# Altium PCB testboard_chip1_package.PcbDoc
Units mm, origin at the board's own origin, x right, y up, seen from the top; angles counter-clockwise.
Board outline 55.4 x 45 mm, 2 copper layers (Top Layer, Bottom Layer); 34 components, 95 nets, 192 pads, 15 vias.
Unrouted connection lines stored in the file: 76.
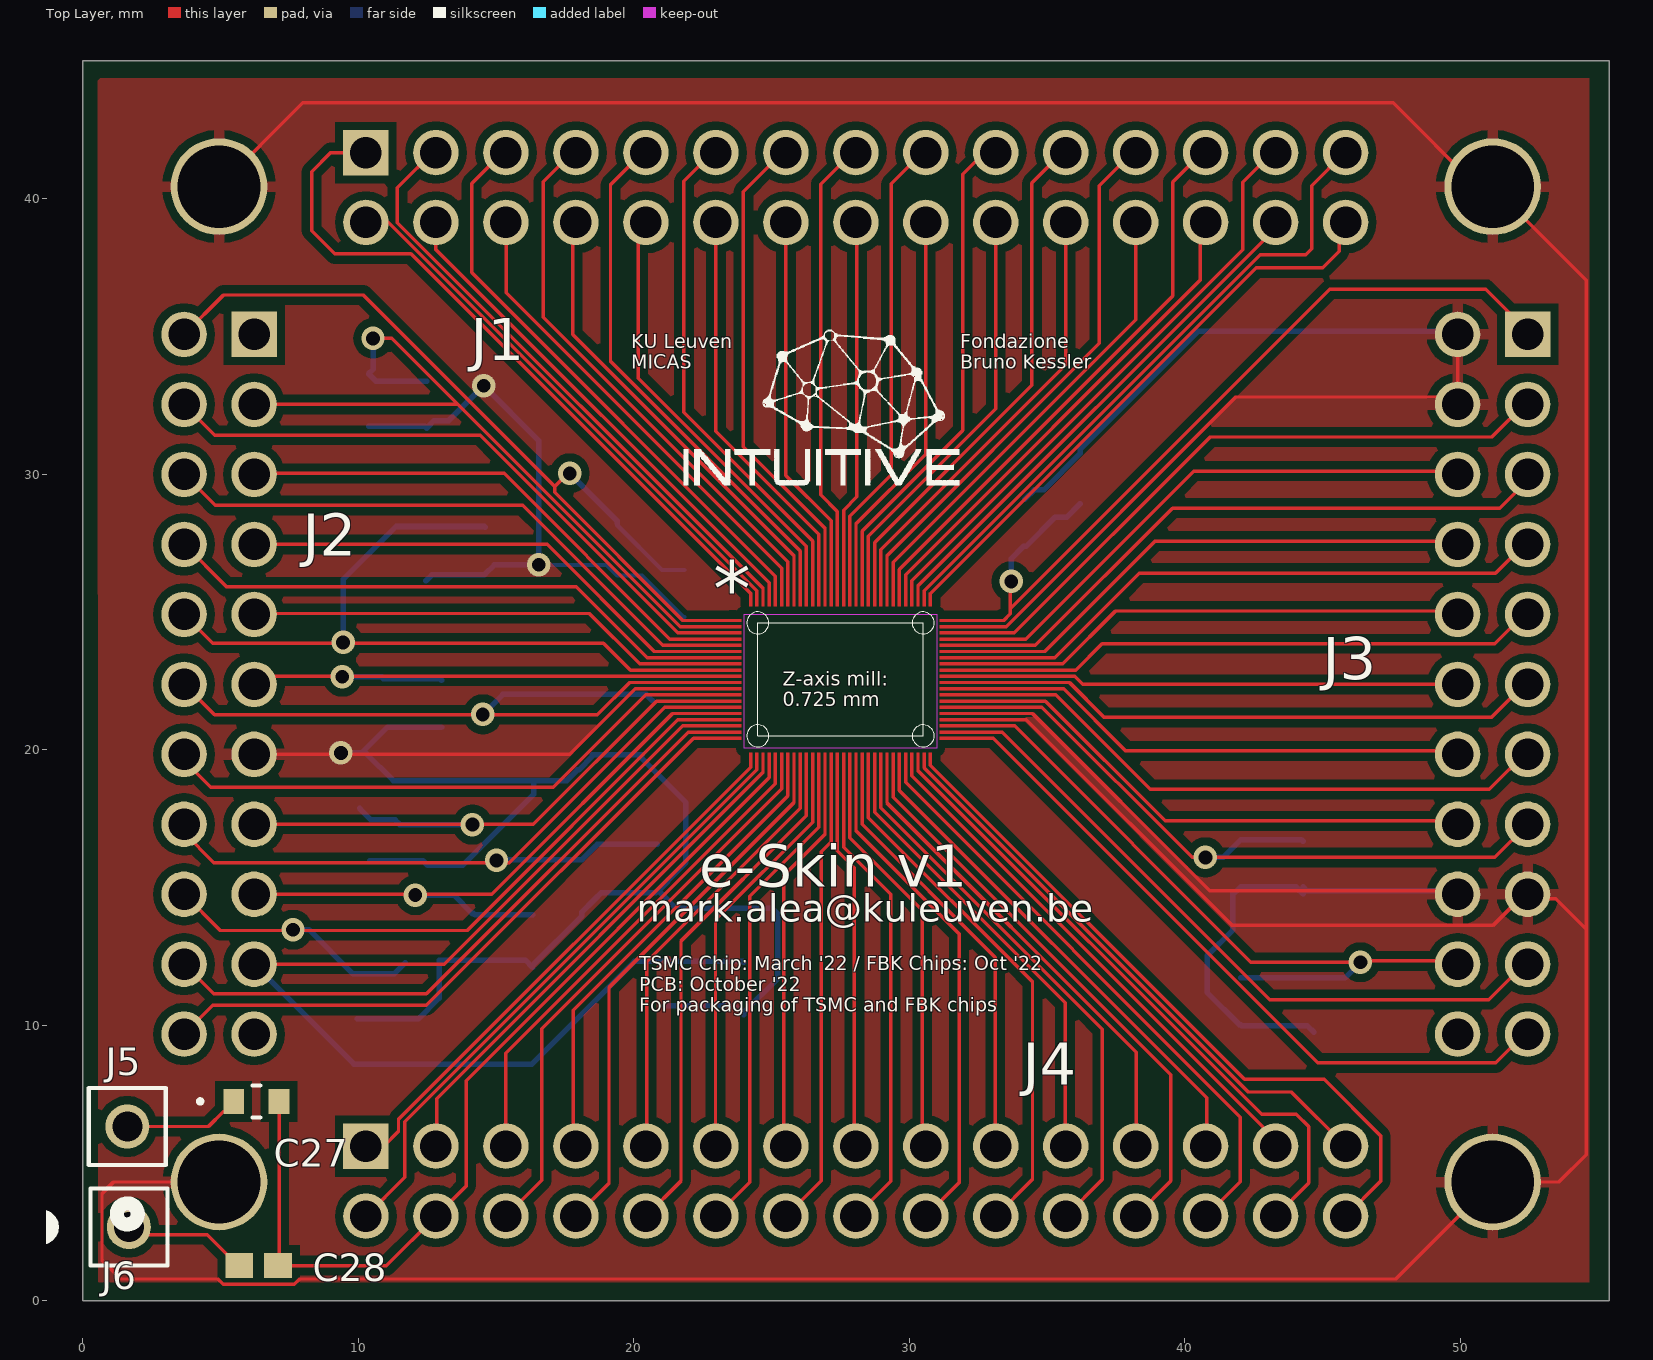
[diagram p0: Top Layer view]
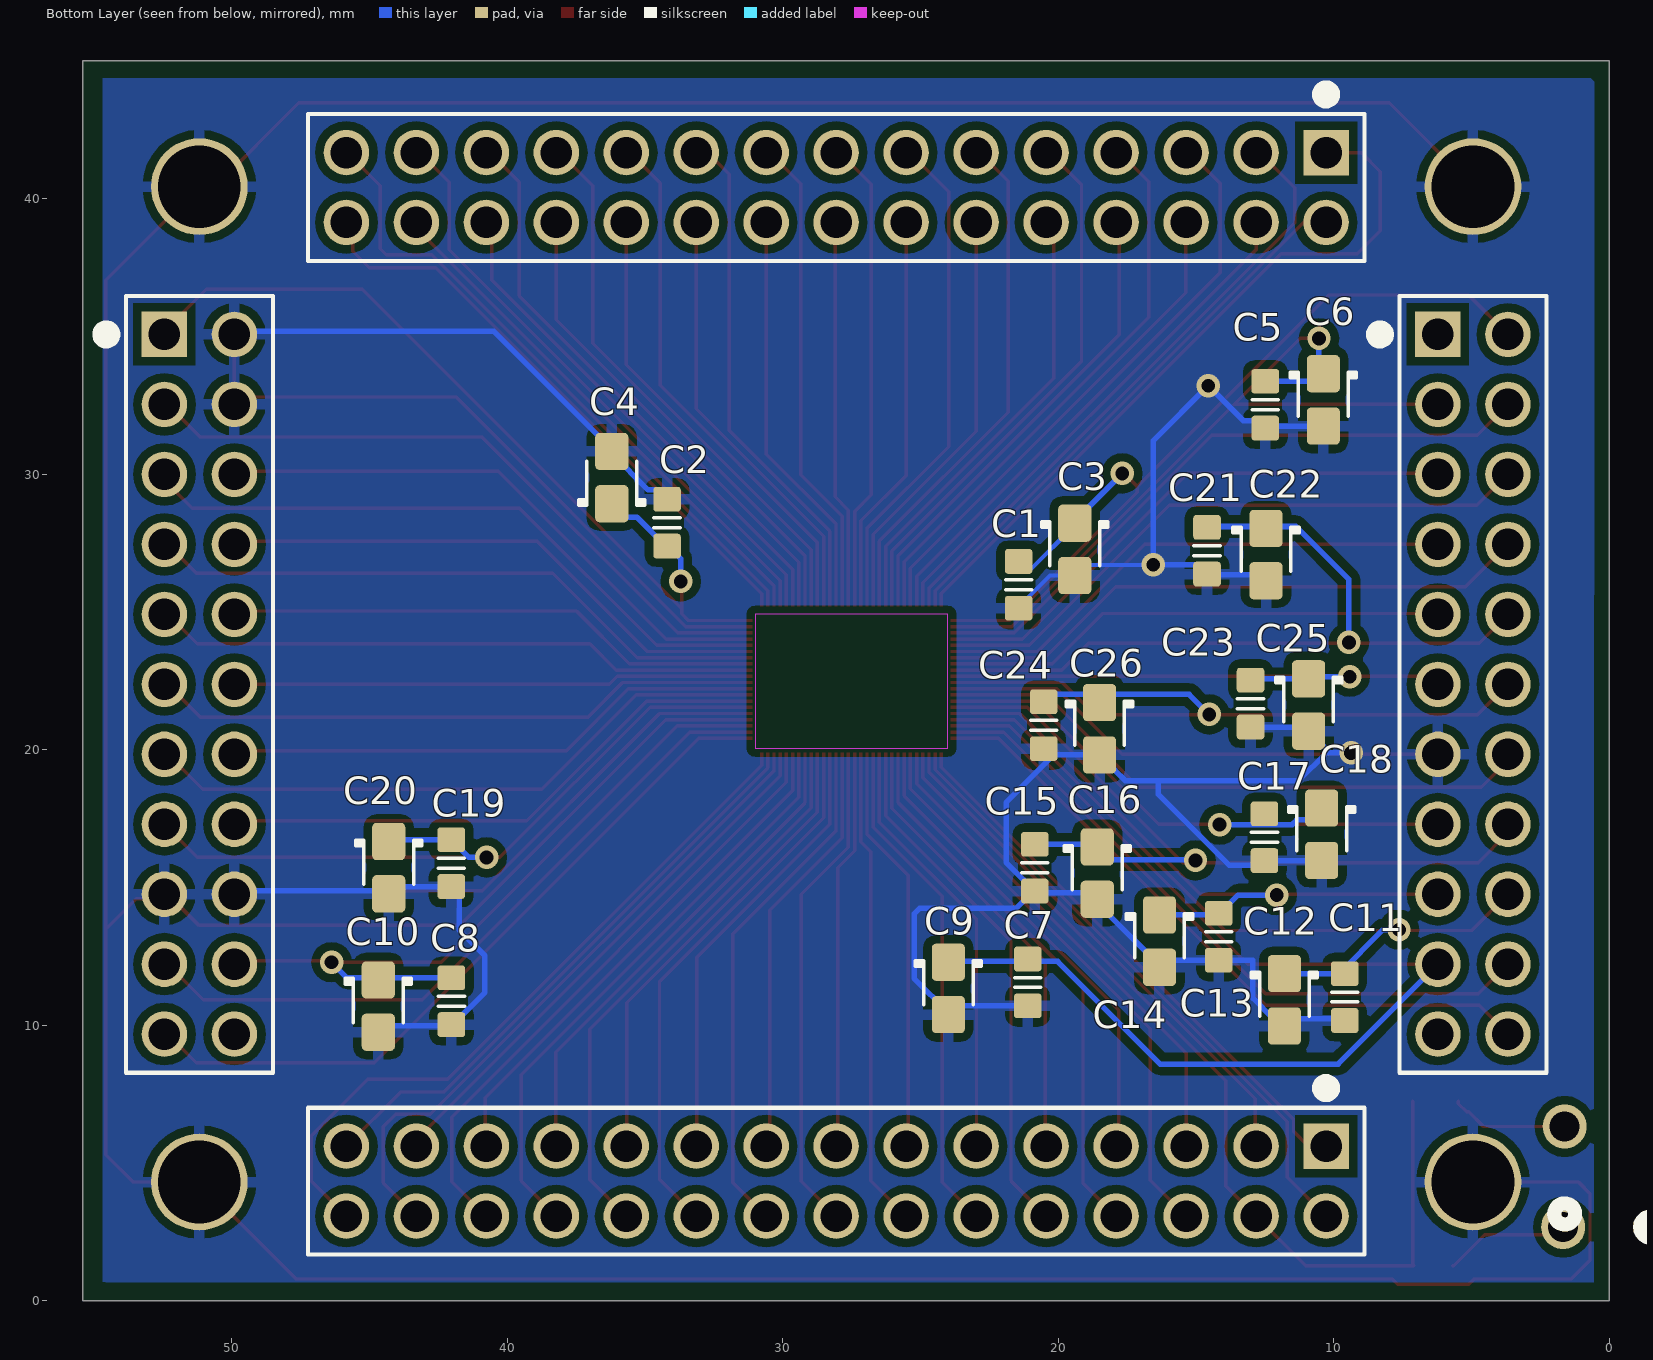
[diagram p1: Bottom Layer view, seen from below]

## Layer stack, top to bottom
Top Solder: solder mask 0.0102, Solder Resist, Dk 3.5
Top Layer: signal copper 0.0356
Dielectric 1: dielectric 0.32, FR-4, Dk 4.8
Bottom Layer: signal copper 0.0356
Bottom Solder: solder mask 0.0102, Solder Resist, Dk 3.5

## Board outline
0,0 55.4,0 55.4,45 0,45

## Design rules (kind name [scope] priority, off if disabled: settings)
BoardOutlineClearance [All] p1: gap=0.25 ignorepadtopadclearanceinfootprint=FALSE except(0: Arc-SplitContinuation Track-SplitContinuation SMDPad-SplitContinuation THPad-SplitContinuation Via-SplitContinuation Fill-SplitContinuation Poly-SplitContinuation Region-SplitContinuation Text-SplitContinuation)
Clearance Clearance-xPP-xTP-xTT [All] p1: gap=0.1 ignorepadtopadclearanceinfootprint=FALSE except(0: Arc-Hole Track-Hole SMDPad-Hole THPad-Hole Via-Hole Fill-Hole Poly-Hole Region-Hole Text-Hole; 0.15: Arc-Text Track-Text SMDPad-Text THPad-Text Via-Text Fill-Text Poly-Text Region-Text Text-Text; 0.2: Arc-Via Track-Via SMDPad-Via THPad-Via Via-Via)
ComponentClearance [All] p1: gap=0.25 collisioncheckmode=3 verticalgap=0.25 showdistances=FALSE
DiffPairsRouting [All] p1: maxlimit=0.25 minlimit=0.25 mostfreqgap=0.25 toplayer_minwidth=0.381 toplayer_maxwidth=0.381 toplayer_prefwidth=0.381 bottomlayer_minwidth=0.381 bottomlayer_maxwidth=0.381 bottomlayer_prefwidth=0.381 maxuncoupledlength=12.5
Height [All] p1: minheight=0 maxheight=25 prefheight=12.5
HoleSize HoleSize-PTH [All] p1: absolutevalues=TRUE maxlimit=2 minlimit=0.15 maxpercent=80.000 minpercent=20.000
HoleToHoleClearance [All] p1: gap=0.35 allowstackedmicrovias=TRUE
MinimumAnnularRing "Minimum IAR  <= 0.45mm" [((ObjectKind = 'Pad') OR (ObjectKind = 'Via')) And (Layer = 'MultiLayer') And (HoleDiameter <= AsMM(0.45))] p1: minimumring=0.125 // minimum inner annular ring for pads <= 0.45mm finished hole size
MinimumAnnularRing "Minimum IAR  > 0.45mm" [((ObjectKind = 'Pad') OR (ObjectKind = 'Via')) And (Layer = 'MultiLayer') And (HoleDiameter > AsMM(0.45))] p2: minimumring=0.125 // minimum inner annular ring for pads > 0.45mm finished hole size
MinimumAnnularRing Minimum-IAR [All] p3: minimumring=0.125
MinimumSolderMaskSliver [All] p1: minsoldermaskwidth=0.08
PlaneClearance PlaneClearance-IPI [All] p1: clearance=0.25
PlaneConnect [All] p1: planeconnectstyle=Relief reliefexpansion=0.15 reliefentries=4 reliefconductorwidth=0.2 reliefairgap=0.2
PolygonConnect PolygonConnect-xTW [All] p1: connectstyle=Relief reliefconductorwidth=0.2 reliefentries=4 polygonreliefangle="90 Angle" airgapwidth=0.2
RoutingCorners [All] p1: cornerstyle=45-Degree minsetback=2.5 maxsetback=2.5
RoutingVias "RoutingVias <= 0.45mm" [(ObjectKind = 'Via') And (HoleDiameter <= AsMM(0.45))] p1: holewidth=0.2 width=0.55 viastyle="Through Hole" minholewidth=0.15 minwidth=0.5 maxholewidth=0.45 maxwidth=0.8
RoutingVias "RoutingVias > 0.45mm" [(ObjectKind = 'Via') And (HoleDiameter > AsMM(0.45))] p2: holewidth=0.5 width=0.85 viastyle="Through Hole" minholewidth=0.5 minwidth=0.85 maxholewidth=0.9 maxwidth=1.25
SilkToSilkClearance [All] p1: silktosilkclearance=0.2
SilkToSolderMaskClearance SilkscreenOverComponentPads [IsPad] p1: minsilkscreentomaskgap=0.2 clearancetoexposedcopper=TRUE
SolderMaskExpansion [All] p1: expansion=0
UnRoutedNet [All] p1: checkbadconnections=TRUE
Width Width-xTW [All] p1: maxlimit=1.5 minlimit=0.1 preferedwidth=0.2
18 further rules are at their usual default settings.

## Classes and differential pairs
component class testboard_chip1_package: C3 C4 C5 C6 C7 C8 C9 C10 C11 C12 C13 C14 C15 C16 C17 C18 C19 C20 C21 C22 C23 C24 C25 C26 C27 C28 J1 J2 J3 J4 J5 J6

## Components (designator, comment, footprint, x,y, rotation, side; value= is the part's Value field where it differs from the comment)
C1 "approved sub OK" CAPC1608N 21.434,25.982 r270 bottom value=100n
C2 "approved sub OK" CAPC1608N 34.196,28.239 r90 bottom value=100n
C3 "10µ" CAPMP2012X150USR 19.396,27.27 r270 bottom
C4 "10µ" CAPMP2012X150USR 36.202,29.874 r90 bottom
C5 "approved sub OK" CAPC1608N 12.481,32.521 r270 bottom value=100n
C6 "10µ" CAPMP2012X150USR 10.375,32.693 r270 bottom
C7 "approved sub OK" CAPC1608N 21.104,11.55 r270 bottom value=100n
C8 "approved sub OK" CAPC1608N 42.024,10.868 r270 bottom value=100n
C9 "10µ" CAPMP2012X150USR 23.986,11.332 r270 bottom
C10 "10µ" CAPMP2012X150USR 44.678,10.692 r270 bottom
C11 "approved sub OK" CAPC1608N 9.595,11.017 r270 bottom value=100n
C12 "10µ" CAPMP2012X150USR 11.786,10.918 r270 bottom
C13 "approved sub OK" CAPC1608N 14.173,13.208 r270 bottom value=100n
C14 "10µ" CAPMP2012X150USR 16.321,13.048 r270 bottom
C15 "approved sub OK" CAPC1608N 20.846,15.714 r270 bottom value=100n
C16 "10µ" CAPMP2012X150USR 18.58,15.519 r270 bottom
C17 "approved sub OK" CAPC1608N 12.51,16.821 r270 bottom value=100n
C18 "10µ" CAPMP2012X150USR 10.432,16.929 r270 bottom
C19 "approved sub OK" CAPC1608N 42.03,15.88 r270 bottom value=100n
C20 "10µ" CAPMP2012X150USR 44.298,15.716 r270 bottom
C21 "approved sub OK" CAPC1608N 14.596,27.221 r270 bottom value=100n
C22 "10µ" CAPMP2012X150USR 12.454,27.08 r270 bottom
C23 "approved sub OK" CAPC1608N 13.017,21.67 r270 bottom value=100n
C24 "approved sub OK" CAPC1608N 20.526,20.884 r270 bottom value=100n
C25 "10µ" CAPMP2012X150USR 10.908,21.62 r270 bottom
C26 "10µ" CAPMP2012X150USR 18.497,20.758 r270 bottom
C27 "0.3pF Cpoly" CAP_0603_AVX 6.295,7.23 r0 top
C28 "2.5pF Cpoly" CAPC17090_87N_KEM 6.382,1.269 r0 top
J1 "TSW-115-07-F-D" TSW-115-07-G-D_SAI 45.836,41.674 r180 top locked
J2 "TSW-111-07-G-D" TSW-111-07-G-D_SAI 6.212,9.67 r90 top locked
J3 "TSW-111-07-G-D" TSW-111-07-G-D_SAI 52.44,9.67 r90 top
J4 "TSW-115-07-F-D" TSW-115-07-G-D_SAI 45.836,5.606 r180 top locked
J5 "901200761" CONN_90120-0761_MOL 1.613,6.32 r90 top
J6 "901200761" CONN_90120-0761_MOL 1.669,2.667 r0 top

## Footprints (in the part's own frame and the unit in brackets; to place one, negate y for a bottom-side part, rotate by r counter-clockwise, add the part's x,y. Pads: shape width x height; smd on the part's side, far side on the other; paste and mask are expansions set on the pad)
CAP_0603_AVX [mm]
  rect 0.75x0.91 smd paste+0 mask+0: 1(-0.825,0) 2(0.825,0)
  silkscreen extent -2.11,-0.58 0.14,0.58, body extent -0.85,-0.46 0.85,0.46, height 0.73
CAPC1608N [mm]
  round 0.254 on Mech14: 0(0,0)
  rrect25% 0.9x1 smd: 1(-0.85,0) 2(0.85,0)
  Top Layer pour cut-out: -0.4,0.6 0.4,0.6 0.4,-0.6 -0.4,-0.6
  silkscreen extent -0.18,-0.48 0.18,0.48, body extent -0.85,-0.45 0.85,0.45, height 0.89
CAPC17090_87N_KEM [mm]
  rect 1x0.9 smd paste+0 mask+0: 1(-0.7,0) 2(0.7,0)
  body extent -0.85,-0.45 0.85,0.45, height 0.87
CAPMP2012X150USR [mm]
  round 0.254 on Mech14: 0(0,0)
  rrect25% 1.35x1.2 smd: 1(-0.95,0) 2(0.95,0)
  Top Layer pour cut-out: -0.4,0.8 0.4,0.8 0.4,-0.8 -0.4,-0.8
  silkscreen extent -1,-1.2 0.6,1.2, body extent -1.02,-0.67 1.03,0.68, height 1.5
CONN_90120-0761_MOL [mil]
  round 63 hole 43 mask+0: 1(0,0)
  silkscreen extent -140,-55 55,55, body extent 0,0 10,10, height 10
TSW-111-07-G-D_SAI [mil]
  rect 65x65 hole 45 mask+0: 1(1000,0)
  round 65 hole 45 mask+0: 2(1000,100) 3(900,0) 4(900,100) 5(800,0) 6(800,100) 7(700,0) 8(700,100) 9(600,0) 10(600,100) 11(500,0) 12(500,100) 13(400,0) 14(400,100) 15(300,0) 16(300,100) 17(200,0) 18(200,100) 19(100,0) 20(100,100) 21(0,0) 22(0,100)
  body extent -55,-50 1045,150, height 330
TSW-115-07-G-D_SAI [mil]
  rect 65x65 hole 45 mask+0: 1(1400,0)
  round 65 hole 45 mask+0: 2(1400,100) 3(1300,0) 4(1300,100) 5(1200,0) 6(1200,100) 7(1100,0) 8(1100,100) 9(1000,0) 10(1000,100) 11(900,0) 12(900,100) 13(800,0) 14(800,100) 15(700,0) 16(700,100) 17(600,0) 18(600,100) 19(500,0) 20(500,100) 21(400,0) 22(400,100) 23(300,0) 24(300,100) 25(200,0) 26(200,100) 27(100,0) 28(100,100) 29(0,0) 30(0,100)
  body extent -40,-50 1460,150, height 330

## Part data
C1 C2 C5 C7 C8 C11 C13 C15 C17 C19 C21 C23 C24: library part CAPC_100n_0603, "Capacitor SMD Cer 100nF 10% 50V X7R 0603", Manufacturer 1="AVX Corporation", Manufacturer 2="TDK Corporation", Manufacturer Part Number 1=06035C104KAT2A, Manufacturer Part Number 2=C1608X7R1H104K, Package / Case="0603 (1608 Metric)", Ratings="50V; X7R", Supplier Part Number 1=478-5052-1-ND, Tolerance=±10%, ComponentLink1Description=http://www.avx.com/docs/Catalogs/cx7r.pdf, ComponentLink1URL=http://www.avx.com/docs/Catalogs/cx7r.pdf, ComponentLink2Description=http://product.tdk.com/capacitor/mlcc/en/documents/mlcc_commercial_general_en.pdf, ComponentLink2URL=http://product.tdk.com/capacitor/mlcc/en/documents/mlcc_commercial_general_en.pdf, Material=ceramic, Supplier 1=Digi-Key, Supplier 2=Digi-Key, Supplier Part Number 2=445-1314-1-ND
C3 C4 C6 C9 C10 C12 C14 C16 C18 C20 C22 C25 C26: library part CAPT_10u_0805_10V, "Capacitor SMD Tantalum 10uF 20% 10V 0805", Manufacturer 1="AVX Corporation", Manufacturer Part Number 1=TAJP106M010RNJ, Package / Case="0805 (2012 metric)", Ratings=10V, Supplier Part Number 1=478-3281-1-ND, Tolerance=±20%, Material=Tantalum, Supplier 1=Digi-Key
C27: library part 06035J0R3PBSTR, "No Description Available", Mfr_Name="KYOCERA AVX", Copyright="Copyright (C) 2022 Ultra Librarian. All rights reserved.", Manufacturer_Part_Number=06035J0R3PBSTR, RefDes=RefDes, Type=DEV
C28: library part CBR06C259B5GAC, "No Description Available", Mfr_Name=Kemet, Copyright="Copyright (C) 2022 Ultra Librarian. All rights reserved.", Manufacturer_Part_Number=CBR06C259B5GAC, RefDes=RefDes, Type=DEV
J1 J2 J3 J4: "No Description Available", Mfr_Name="Samtec Inc", Copyright="Copyright (C) 2022 Ultra Librarian. All rights reserved.", RefDes=RefDes, Type=DEV
  J1 J4: Manufacturer_Part_Number=TSW-115-07-F-D
  J2 J3: Manufacturer_Part_Number=TSW-111-07-G-D
J5 J6: "No Description Available", Mfr_Name="Molex Connector Corporation", Copyright="Copyright (C) 2022 Ultra Librarian. All rights reserved.", Manufacturer_Part_Number=901200761, RefDes=RefDes, Type=DEV

## Free pads (board coordinates)
  round 3.508 hole 3 mask+0: 1(4.942,40.436) 2(51.17,40.436) 3(4.942,4.304) 4(51.17,4.304)

## Via types
v1: diameter 0.85, hole 0.5, Top Layer to Bottom Layer, 15 vias

## Nets (pads, with @x,y where several pads share a name; then routed paths per layer and width w, separated by ;. In a path a pad name is that pad's centre, name@x,y a point inside that pad or via, vN(x,y) a via of type N, cw(c..) or ccw(c..) an arc to the next point about the centre after c; other vN are vias at no path point)
ACK: J3.9 | length 21.8
  Top Layer w0.125: 31.512,22.886 36.034,22.886 36.993,23.845 51.254,23.845 J3.9@52.44,25.031
ACKX_PULSE_EXT<0>: J1.3 | length 22.4
  Top Layer w0.125: J1.3@12.816,41.795 11.416,40.395 11.416,39.132 24.687,25.86 24.687,25.823 24.687,25.512
ACKX_PULSE_EXT<1>: J1.6 | length 17.9
  Top Layer w0.125: J1.6@15.356,39.255 15.362,39.249 15.362,36.584 25.362,26.584 25.362,25.487
ACKX_PULSE_EXT<2>: J1.9 | length 19.7
  Top Layer w0.125: J1.9@20.436,41.795 19.151,40.51 19.151,34.097 26.037,27.211 26.037,25.472
ACKX_PULSE_EXT<3>: J1.12 | length 15.3
  Top Layer w0.125: J1.12@22.976,39.255 J1.12 22.976,31.552 26.712,27.816 26.712,25.539
ACKX_PULSE_EXT<4>: J1.15 | length 17
  Top Layer w0.125: 27.387,25.53 27.387,28.643 26.786,29.244 26.786,40.525 J1.15@28.056,41.795
ACKX_PULSE_EXT<5>: J1.18 | length 14.8
  Top Layer w0.125: 28.062,25.5 28.062,28.193 30.596,30.727 J1.18 J1.18@30.596,39.255
ACKX_PULSE_EXT<6>: J1.21 | length 19.1
  Top Layer w0.125: 28.737,25.571 28.737,27.518 34.449,33.23 34.449,40.568 J1.21@35.676,41.795
ACKX_PULSE_EXT<7>: J1.24 | length 17.3
  Top Layer w0.125: 29.412,25.579 29.412,26.805 38.216,35.609 J1.24 J1.24@38.216,39.255
ACKX_PULSE_EXT<8>: J1.27 | length 21.6
  Top Layer w0.125: 30.087,25.662 30.087,26.136 42.097,38.145 42.097,40.596 J1.27@43.296,41.795
ACKX_PULSE_EXT<9>: J1.30 | length 21.1
  Top Layer w0.125: 30.765,25.664 42.586,37.485 45.01,37.485 45.609,38.084 45.609,38.907 J1.30
ADDRX<0>: J3.8 | length 20
  Top Layer w0.125: 31.605,23.561 34.911,23.561 38.921,27.571 J3.8@49.9,27.571
ADDRX<1>: J3.5 | length 23.7
  Top Layer w0.125: 31.583,23.786 34.569,23.786 39.551,28.768 51.433,28.768 52.44,29.775 J3.5 J3.5@52.44,30.111
ADDRX<2>: J3.6 | length 20.8
  Top Layer w0.125: 31.614,24.011 34.221,24.011 40.321,30.111 J3.6@49.9,30.111
ADDRX<3>: J3.3 | length 24.3
  Top Layer w0.125: 31.61,24.236 33.812,24.236 40.923,31.347 51.136,31.347 J3.3@52.44,32.651
ADDRY<0>: J3.16 | length 20.2
  Top Layer w0.125: 31.495,21.761 34.941,21.761 39.291,17.411 J3.16@49.9,17.411
ADDRY<1>: J3.13 | length 22.9
  Top Layer w0.125: 31.532,21.986 35.32,21.986 38.751,18.555 51.044,18.555 J3.13@52.44,19.951
ADDRY<2>: J3.14 | length 19.2
  Top Layer w0.125: 31.589,22.211 35.599,22.211 37.859,19.951 J3.14@49.9,19.951
ADDRY<3>: J3.11 | length 22
  Top Layer w0.125: 31.492,22.436 35.812,22.436 37.081,21.167 51.116,21.167 J3.11@52.44,22.491
AER_DIS_EXT: J4.8 | length 19.8
  Top Layer w0.125: J4.8 19.097,4.267 19.097,11.365 25.813,18.081 25.813,19.59
AER_RST: J3.12 | length 18.7
  Top Layer w0.125: 31.482,22.661 36.008,22.661 36.298,22.37 J3.12 ; J3.12@49.761,22.63 J3.12@49.9,22.491
AVDD: C1.1 C3.1 C17.1 C18.1 J2.2 J2.15 | length 55.3
  Top Layer w0.125: J2.2 5.105,36.503 10.174,36.503 17.125,29.551 ; J2.15 16.351,17.29 20.823,21.762 23.498,21.762 ; v1(17.673,30.027) 17.601,30.027 17.125,29.551 ; 23.443,24.687 21.778,24.687 17.125,29.339 17.125,29.551
  Bottom Layer w0.15: C3.1 19.396,28.145 21.022,26.519 C1.1@21.842,26.519
  Bottom Layer w0.2: C18.1@10.045,17.865 10.457,17.453 11.332,17.453 11.506,17.279 v1(14.14,17.279) ; v1(17.673,30.027) 19.396,28.304 C3.1
DVDD: C2.1 C4.1 C7.1 C9.1 J2.19 J3.1 | length 73.5
  Top Layer w0.125: J2.19 13.122,12.21 21.773,20.861 23.514,20.861 ; 31.554,24.686 33.421,24.686 33.669,24.934 33.669,25.113 ; v1(33.7,26.107) 33.669,26.076 33.669,25.113 ; J3.1@52.44,35.191 50.92,36.711 45.267,36.711 33.669,25.113
  Bottom Layer w0.2: J2.19 9.838,8.584 16.294,8.584 20.021,12.311 23.957,12.311 C9.1 ; v1(33.7,26.107) 33.7,26.936 34.153,27.389 C2.1 34.246,27.389 35.295,28.438 35.716,28.438 C4.1
GND: C1.2 C2.2 C3.2 C4.2 C5.2 C6.2 C7.2 C8.2 C9.2 C10.2 C11.2 C12.2 C13.2 C14.2 C15.2 C16.2 C17.2 C18.2 C19.2 C20.2 C21.2 C22.2 C23.2 C24.2 C25.2 C26.2 J2.13 J3.2 J3.4 J3.17 J3.18 pad.1 pad.2 pad.3 pad.4 | length 351.8
  Top Layer w0.125: pad.3 1.112,4.304 0.694,3.886 0.694,1.46 1.37,0.784 4.899,0.784 5.089,0.594 7.675,0.594 7.865,0.784 47.65,0.784 pad.4 53.572,4.304 54.564,5.296 54.564,13.483 ; pad.1 7.987,43.481 47.56,43.481 50.605,40.436 pad.2 54.564,37.042 54.564,13.483 ; J2.13 17.674,19.83 20.055,22.211 23.458,22.211 ; 31.403,21.086 34.247,21.086 41.716,13.617 51.186,13.617 52.44,14.871 52.727,14.584 53.463,14.584 54.564,13.483 ; 31.572,21.311 34.469,21.311 40.909,14.871 J3.18@49.9,14.871 ; 31.61,24.461 33.514,24.461 41.853,32.8 49.751,32.8 49.9,32.651 J3.2@49.9,35.191
  Bottom Layer w0.15: v1(16.546,26.708) 19.008,26.708 C3.2 20.291,26.32 21.792,24.819 C1.2@21.842,24.819
  Bottom Layer w0.2: v1(9.365,19.88) 10.118,19.88 ; C11.2@9.967,10.23 12.182,10.23 12.932,10.98 12.932,12.358 C13.2 16.061,12.358 C14.2 16.321,12.173 18.111,13.963 18.111,14.1 C16.2 18.821,14.81 20.792,14.81 C15.2 C15.2@20.889,14.864 ; C6.2 12.409,31.743 C5.2 12.752,31.942 13.281,31.942 v1(14.551,33.212) 16.546,31.217 v1(16.546,26.708) 14.933,26.708 C21.2 14.569,26.344 12.668,26.344 C22.2 ; C18.2@10.419,15.971 12.34,15.971 12.51,15.801 13.787,15.801 16.37,18.384 16.37,18.874 ; C23.2 11.058,20.82 C25.2 10.118,19.88 ; C24.2@20.161,19.807 21.891,18.077 21.891,15.909 21.238,15.256 21.238,15.213 C15.2@20.889,14.864 ; C24.2@20.3,19.808 C26.2 18.497,19.76 18.001,19.264 17.953,19.264 17.563,18.874 16.37,18.874 ; C7.2 23.668,10.7 C9.2 23.986,10.457 25.229,11.7 25.229,14.034 25.024,14.239 21.528,14.239 20.903,14.864 C15.2@20.889,14.864 ; C2.2 34.538,29.431 34.884,29.431 36.202,30.749 C4.2 36.202,30.899 40.494,35.191 J3.2@49.9,35.191 ; C20.2@44.292,15.02 C20.2@44.298,15.014 ; C10.2 44.446,9.974 42.068,9.974 C8.2 41.974,10.018 40.808,11.184 40.808,12.518 41.742,13.452 41.742,14.742 C19.2 44.034,15.03 C20.2 C20.2@44.298,15.014 ; J3.18@49.9,14.871 44.441,14.871 C20.2@44.298,15.014 ; 10.118,19.88 10.263,19.88 11.269,18.874 16.37,18.874
HEM_OUT: J2.14 | length 21.9
  Top Layer w0.125: J2.14 3.672,19.597 4.634,18.635 17.081,18.635 20.432,21.986 23.545,21.986
IBLEED: J2.6 | length 22.4
  Top Layer w0.125: J2.6 4.798,28.864 15.965,28.864 21.043,23.786 23.526,23.786
ISLEW: J2.4 | length 23.2
  Top Layer w0.125: J2.4 4.791,31.411 14.417,31.411 21.591,24.236 23.477,24.236
ISPK: J2.5 | length 19.8
  Top Layer w0.125: J2.5 6.247,30.025 15.29,30.025 21.304,24.011 23.526,24.011
ISPKFAST: J2.9 | length 18.1
  Top Layer w0.125: J2.9 6.243,24.941 18.387,24.941 20.217,23.111 23.573,23.111
ITAIL: J2.8 | length 21.6
  Top Layer w0.125: J2.8 5.212,25.911 17.908,25.911 20.483,23.336 23.547,23.336
ITH: J2.7 | length 19
  Top Layer w0.125: J2.7 16.855,27.45 20.744,23.561 23.565,23.561
LCVDD: C15.1 C16.1 J2.16 | length 29.1
  Top Layer w0.125: J2.16 3.672,16.982 4.755,15.899 15.479,15.899 21.116,21.536 23.562,21.536
  Bottom Layer w0.2: v1(15.015,15.977) 15.048,16.01 18.122,16.01 C16.1 18.675,16.564 C15.1
N_COX_OFF_EXT<0>: J1.2 | length 20
  Top Layer w0.125: J1.2@10.276,39.255 10.974,39.255 24.463,25.767 24.463,25.495
N_COX_OFF_EXT<1>: J1.5 | length 21.3
  Top Layer w0.125: J1.5@15.356,41.795 14.109,40.548 14.109,37.319 25.137,26.291 25.137,25.622
N_COX_OFF_EXT<2>: J1.8 | length 17.1
  Top Layer w0.125: J1.8@17.896,39.255 17.781,39.14 17.781,35.069 25.812,27.038 25.812,25.554
N_COX_OFF_EXT<3>: J1.11 | length 18.7
  Top Layer w0.125: J1.11@22.976,41.795 21.817,40.636 21.817,32.244 26.487,27.574 26.487,25.539
N_COX_OFF_EXT<4>: J1.14 | length 14.3
  Top Layer w0.125: J1.14@25.516,39.255 J1.14 25.516,29.95 27.162,28.304 27.162,25.61
N_COX_OFF_EXT<5>: J1.17 | length 17.3
  Top Layer w0.125: 27.838,25.649 27.838,28.473 29.335,29.97 29.335,40.534 J1.17@30.596,41.795
N_COX_OFF_EXT<6>: J1.20 | length 15.6
  Top Layer w0.125: 28.512,25.579 28.512,27.752 33.136,32.376 J1.20 J1.20@33.136,39.255
N_COX_OFF_EXT<7>: J1.23 | length 19.9
  Top Layer w0.125: 29.188,25.626 29.188,27.042 36.891,34.745 36.891,40.47 J1.23@38.216,41.795
N_COX_OFF_EXT<8>: J1.26 | length 18.2
  Top Layer w0.125: 29.862,25.518 29.862,26.354 40.551,37.043 40.551,39.05 J1.26@40.756,39.255
N_COX_OFF_EXT<9>: J1.29 | length 23.5
  Top Layer w0.125: 30.537,25.537 30.537,25.767 42.741,37.97 44.392,37.97 44.603,38.181 44.603,40.471 45.806,41.674 J1.29
N_COX_ON_EXT<0>: J1.1 | length 26.1
  Top Layer w0.125: 8.999,41.674 8.301,40.976 8.301,38.836 9.141,37.996 11.909,37.996 24.237,25.668 24.237,25.406 ; 9.016,41.673 J1.1@10.293,41.673
N_COX_ON_EXT<1>: J1.4 | length 18.8
  Top Layer w0.125: J1.4@12.816,39.255 J1.4 12.816,38.146 24.912,26.05 24.912,25.453
N_COX_ON_EXT<2>: J1.7 | length 20.4
  Top Layer w0.125: J1.7@17.896,41.795 16.716,40.615 16.716,35.695 25.588,26.823 25.588,25.509
N_COX_ON_EXT<3>: J1.10 | length 16.4
  Top Layer w0.125: J1.10@20.436,39.255 20.156,38.975 20.156,33.482 26.263,27.376 26.263,25.539
N_COX_ON_EXT<4>: J1.13 | length 18
  Top Layer w0.125: J1.13@25.516,41.795 23.977,40.256 23.977,31 26.938,28.04 26.938,25.681
N_COX_ON_EXT<5>: J1.16 | length 13.9
  Top Layer w0.125: 27.612,25.539 27.612,28.694 28.094,29.176 28.094,39.217 J1.16@28.056,39.255
N_COX_ON_EXT<6>: J1.19 | length 18.4
  Top Layer w0.125: 28.287,25.571 28.287,27.936 31.936,31.584 31.936,40.888 32.843,41.795 J1.19@33.136,41.795
N_COX_ON_EXT<7>: J1.22 | length 16.4
  Top Layer w0.125: 28.962,25.595 28.962,27.252 35.676,33.966 J1.22 J1.22@35.676,39.255
N_COX_ON_EXT<8>: J1.25 | length 20.8
  Top Layer w0.125: 29.637,25.571 29.637,26.538 39.564,36.465 39.564,40.603 J1.25@40.756,41.795
N_COX_ON_EXT<9>: J1.28 | length 19.1
  Top Layer w0.125: 30.312,25.533 30.312,25.941 43.296,38.925 J1.28 J1.28@43.296,39.255
N_P_EXT<0>: J4.9 | length 15.9
  Top Layer w0.125: J4.9@20.46,5.856 20.46,11.631 ; 20.46,11.655 20.46,12.293 26.038,17.871 26.038,19.484
N_P_EXT<1>: J4.11 | length 15.3
  Top Layer w0.125: J4.11@22.697,5.856 22.964,6.123 22.964,13.846 26.488,17.37 26.488,19.598
N_P_EXT<2>: J4.13 | length 14.2
  Top Layer w0.125: J4.13@25.441,5.856 25.441,15.432 26.938,16.929 26.938,19.48
N_P_EXT<3>: J4.15 | length 14.1
  Top Layer w0.125: 27.388,19.485 27.388,16.328 28.004,15.712 28.004,6.405 J4.15@27.493,5.894
N_P_EXT<4>: J4.17 | length 14.7
  Top Layer w0.125: 27.838,19.498 27.838,16.796 30.469,14.165 J4.17@30.469,5.856
N_P_EXT<5>: J4.19 | length 15.6
  Top Layer w0.125: 28.288,19.503 28.288,17.284 33.118,12.454 J4.19@33.118,5.856
N_P_EXT<6>: J4.21 | length 16.2
  Top Layer w0.125: 28.738,19.422 28.738,17.724 35.656,10.806 J4.21@35.656,6.136
N_P_EXT<7>: J4.23 | length 17.3
  Top Layer w0.125: 29.188,19.549 29.188,18.062 38.233,9.017 J4.23@38.233,5.971
N_P_EXT<8>: J4.25 | length 18.3
  Top Layer w0.125: 29.638,19.581 29.638,18.516 40.794,7.36 J4.25@40.794,5.862
N_P_EXT<9>: J4.27 | length 19.1
  Top Layer w0.125: 30.088,19.489 30.088,19.049 J4.27@43.282,5.856
N_P_EXT<10>: J4.29 | length 21.3
  Top Layer w0.125: 30.538,19.649 30.538,19.332 42.297,7.573 43.87,7.573 J4.29
POLING_MODE_SW: J4.3 | length 18.9
  Top Layer w0.125: J4.3 12.837,5.627 12.837,7.331 24.688,19.181 24.688,19.598
POS_CALIB: C27.2 C28.2 J4.4 | length 34
  Top Layer w0.125: C27.2 7.12,1.307 C28.2 11.019,1.269 J4.4 13.909,4.158 13.909,7.983 24.913,18.987 24.913,19.635
POS_CALIB_CIN0: C27.1 J5.1 | length 4.3
  Top Layer w0.125: J5.1 4.56,6.32 5.09,6.85 5.17,6.85 5.47,7.15 C27.1
POS_CALIB_CIN1: C28.1 J6.1 | length 4.6
  Top Layer w0.125: J6.1 1.946,2.39 4.511,2.39 5.632,1.269 C28.1
POS_TEST: J4.5 | length 17.4
  Top Layer w0.125: J4.5@15.354,6.061 15.354,8.984 25.138,18.768 25.138,19.425 25.138,19.439
REQOFF: J3.10 | length 19.2
  Top Layer w0.125: 31.5,23.111 35.563,23.111 37.483,25.031 J3.10@49.9,25.031
REQON: J3.7 | length 22.7
  Top Layer w0.125: 31.541,23.336 35.271,23.336 38.341,26.406 51.275,26.406 J3.7@52.44,27.571
S_EXT<0>: J4.10 | length 18.9
  Top Layer w0.125: J4.10 21.711,4.341 21.711,13.053 26.263,17.604 26.263,19.575
S_EXT<1>: J4.12 | length 17.9
  Top Layer w0.125: J4.12 24.205,4.295 24.205,14.679 26.713,17.187 26.713,19.447
S_EXT<2>: J4.14 | length 17.1
  Top Layer w0.125: J4.14 26.799,4.349 26.799,16.286 27.163,16.65 27.163,19.493
S_EXT<3>: J4.16 | length 17.7
  Top Layer w0.125: 27.613,19.525 27.613,16.457 29.319,14.751 29.319,4.329 J4.16
S_EXT<4>: J4.18 | length 18.4
  Top Layer w0.125: 28.063,19.456 28.063,17.06 31.803,13.32 31.803,4.273 J4.18
S_EXT<5>: J4.20 | length 19.5
  Top Layer w0.125: 28.513,19.503 28.513,17.526 34.469,11.57 34.469,4.399 J4.20
S_EXT<6>: J4.22 | length 20.4
  Top Layer w0.125: 28.963,19.556 28.963,17.889 37.005,9.847 37.005,4.395 J4.22
S_EXT<7>: J4.24 | length 21.2
  Top Layer w0.125: 29.413,19.57 29.413,18.276 39.491,8.198 39.491,4.341 J4.24
S_EXT<8>: J4.26 | length 22.1
  Top Layer w0.125: 29.863,19.643 29.863,18.809 42.011,6.661 42.011,4.321 J4.26
S_EXT<9>: J4.28 | length 23.9
  Top Layer w0.125: 30.313,19.836 30.313,19.239 42.784,6.768 44.049,6.768 44.498,6.319 44.498,4.268 J4.28
S_EXT<10>: J4.30 | length 25.4
  Top Layer w0.125: 30.763,19.515 30.763,19.435 42.166,8.031 45.053,8.031 47.103,5.981 47.103,4.333 J4.30
SCLK: J2.22 | length 24.3
  Top Layer w0.125: J2.22 4.718,10.716 12.468,10.716 22.163,20.411 23.484,20.411
SHIFT: J2.20 | length 24.1
  Top Layer w0.125: J2.20 4.75,11.132 12.472,11.132 21.976,20.636 23.42,20.636
SIN: J3.21 | length 26.3
  Top Layer w0.125: 31.474,20.411 33.046,20.411 44.826,8.631 51.28,8.631 J3.21@52.44,9.791
SOUT: J4.1 | length 20.2
  Top Layer w0.125: J4.1 10.923,5.606 11.457,6.14 11.457,6.586 24.238,19.367 24.238,19.612
TSENSE: J3.19 | length 25.6
  Top Layer w0.125: 31.408,20.636 33.365,20.636 43.076,10.925 51.034,10.925 J3.19@52.44,12.331
VDD: C8.1 C10.1 C13.1 C14.1 J2.17 J3.20 | length 51.1
  Top Layer w0.125: J2.17 14.841,14.75 21.402,21.311 23.502,21.311 ; 31.493,20.861 33.819,20.861 42.397,12.283 v1(46.372,12.283) ; v1@46.372,12.331 J3.20@49.9,12.331
  Bottom Layer w0.2: v1(12.066,14.721) 13.464,14.721 14.15,14.035 C13.1 14.233,13.998 C14.1 ; C8.1 45.807,11.718 v1(46.372,12.283)
VDDPST: C11.1 C12.1 C19.1 C20.1 J2.18 J3.15 | length 56
  Top Layer w0.125: J2.18 4.987,13.435 13.945,13.435 21.596,21.086 23.454,21.086 ; 31.567,21.536 34.812,21.536 40.262,16.086 51.247,16.086 52.44,17.279 J3.15@52.44,17.411
  Bottom Layer w0.2: v1(7.627,13.464) 8.201,13.464 9.805,11.86 11.298,11.86 C12.1@11.694,12.256 ; v1(40.747,16.088) 41.388,16.088 C19.1 44.234,16.73 C20.1
VIL: C5.1 C6.1 J2.3 | length 28.2
  Top Layer w0.125: J2.3 13.554,32.53 ; v1(10.531,34.928) 11.218,34.928 21.685,24.461 23.477,24.461
  Bottom Layer w0.2: v1(10.531,34.928) 10.531,33.799 C6.1 10.647,33.371 C5.1
VMODE_EXT: J4.7 | length 17
  Top Layer w0.125: J4.7@17.803,5.856 17.803,10.532 25.588,18.317 25.588,19.644
VPOS_AFE: J4.6 | length 20.6
  Top Layer w0.125: J4.6 16.653,4.363 16.653,9.874 25.363,18.584 25.363,19.554
VPOS_CM: C21.1 C22.1 J2.10 | length 29
  Top Layer w0.125: J2.10 4.715,23.867 18.899,23.867 19.879,22.886 23.56,22.886
  Bottom Layer w0.2: v1(9.446,23.891) 9.446,26.178 11.367,28.099 14.568,28.099 C21.1
VREFH: C23.1 C25.1 J2.11 | length 21.3
  Top Layer w0.125: J2.11 J2.11@6.476,22.634 ; J2.11@6.281,22.662 9.416,22.662 23.512,22.662
  Top Layer w0.2: v1@9.43,22.661 v1(9.416,22.647) v1@9.439,22.624
  Bottom Layer w0.2: v1(9.416,22.647) 10.831,22.647 C25.1 12.967,22.57 C23.1
VREFL: C24.1 C26.1 J2.12 | length 27.3
  Top Layer w0.125: J2.12 4.778,21.264 18.675,21.264 19.848,22.437 23.443,22.437
  Bottom Layer w0.2: v1(14.517,21.278) 15.246,22.007 20.444,22.007 C24.1@20.679,21.772
VTOP: J4.2 | length 22.5
  Top Layer w0.125: J4.2 11.682,4.472 11.682,6.493 24.463,19.274 24.463,19.703
pads on no net: C1.0 C2.0 C3.0 C4.0 C5.0 C6.0 C7.0 C8.0 C9.0 C10.0 C11.0 C12.0 C13.0 C14.0 C15.0 C16.0 C17.0 C18.0 C19.0 C20.0 C21.0 C22.0 C23.0 C24.0 C25.0 C26.0 J2.1 J2.21 J3.22

## Polygon pours and split planes (outlines as drawn)
GND on Top Layer "Top Layer-GND" (solid, pour order 34): 0.547,44.362 54.686,44.362 54.683,44.359 54.683,0.67 0.577,0.67 0.559,0.688
GND on Top Layer "Top Layer-GND 4" (solid, pour order 28): 667.329,21.195
GND on Top Layer "Top Layer-GND 3" (solid, pour order 10): 1.293,45.155
GND on Top Layer "Top Layer-GND 1" (solid, pour order 4): 2.515,48.25
GND on Top Layer "Top Layer-GND 2" (solid, pour order 0): -6.178,14.365
GND on Bottom Layer "Bottom Layer-GND" (solid, pour order 32): 0.546,44.361 0.547,44.362 54.686,44.362 54.686,0.676 54.688,0.673 54.676,0.661 0.561,0.661
GND on Bottom Layer "Bottom Layer-GND 1" (solid, pour order 22): 0.533,44.364

## Keep-outs
Keep-Out Layer:
  region: 24.005,24.915 30.999,24.915 30.999,20.042 24.005,20.042

## Other copper
Top Layer:
  rectangle net AER_RST: 31.1,22.598 31.6,22.724
  rectangle net SIN: 31.1,20.349 31.6,20.474
  rectangle net ACK: 31.1,22.823 31.6,22.948
  rectangle net TSENSE: 31.1,20.573 31.6,20.698
  region net ACKX_PULSE_EXT<7>: 29.475,25.2 29.475,25.7 29.35,25.7 29.35,25.2
  rectangle net REQOFF: 31.1,23.048 31.6,23.173
  rectangle net REQON: 31.1,23.273 31.6,23.398
  rectangle net DVDD: 31.1,24.623 31.6,24.749
  rectangle net GND: 31.1,24.399 31.6,24.524
  rectangle net ADDRX<3>: 31.1,24.174 31.6,24.299
  rectangle net ADDRX<0>: 31.1,23.498 31.6,23.623
  rectangle net ADDRX<1>: 31.1,23.723 31.6,23.848
  rectangle net ADDRX<2>: 31.1,23.948 31.6,24.074
  rectangle net VDD: 31.1,20.799 31.6,20.924
  rectangle net GND: 31.1,21.248 31.6,21.373
  rectangle net GND: 31.1,21.023 31.6,21.148
  rectangle net ADDRY<1>: 31.1,21.923 31.6,22.049
  rectangle net ADDRY<0>: 31.1,21.698 31.6,21.823
  rectangle net ADDRY<3>: 31.1,22.373 31.6,22.498
  rectangle net ADDRY<2>: 31.1,22.148 31.6,22.273
  rectangle net VDDPST: 31.1,21.473 31.6,21.598
  region net S_EXT<7>: 29.475,19.4 29.475,19.899 29.35,19.899 29.35,19.4
  region net ACKX_PULSE_EXT<1>: 25.425,25.2 25.425,25.7 25.3,25.7 25.3,25.2
  region net ACKX_PULSE_EXT<4>: 27.45,25.2 27.45,25.7 27.325,25.7 27.325,25.2
  region net VPOS_AFE: 25.426,19.4 25.426,19.9 25.301,19.9 25.301,19.4
  region net N_P_EXT<3>: 27.451,19.4 27.451,19.9 27.325,19.9 27.325,19.4
  rectangle net VREFH: 23.4,22.599 23.9,22.724
  rectangle net SHIFT: 23.4,20.574 23.9,20.699
  region net N_COX_OFF_EXT<8>: 29.925,25.2 29.925,25.7 29.8,25.7 29.8,25.2
  region net N_COX_ON_EXT<8>: 29.7,25.2 29.7,25.7 29.575,25.7 29.575,25.2
  region net ACKX_PULSE_EXT<8>: 30.15,25.2 30.15,25.7 30.025,25.7 30.025,25.2
  region net N_COX_ON_EXT<9>: 30.375,25.2 30.375,25.7 30.25,25.7 30.25,25.2
  region net N_COX_OFF_EXT<9>: 30.6,25.2 30.6,25.7 30.475,25.7 30.475,25.2
  region net ACKX_PULSE_EXT<9>: 30.825,25.2 30.825,25.7 30.7,25.7 30.7,25.2
  region net N_P_EXT<10>: 30.6,19.4 30.6,19.899 30.475,19.899 30.475,19.4
  region net S_EXT<9>: 30.376,19.4 30.376,19.9 30.251,19.9 30.251,19.4
  region net N_P_EXT<9>: 30.15,19.4 30.15,19.899 30.025,19.899 30.025,19.4
  region net N_P_EXT<8>: 29.7,19.4 29.7,19.899 29.575,19.899 29.575,19.4
  region net S_EXT<8>: 29.925,19.4 29.925,19.899 29.8,19.899 29.8,19.4
  region net S_EXT<10>: 30.825,19.4 30.825,19.899 30.7,19.899 30.7,19.4
  region net ACKX_PULSE_EXT<5>: 28.125,25.2 28.125,25.7 28,25.7 28,25.2
  region net N_COX_ON_EXT<7>: 29.025,25.2 29.025,25.7 28.9,25.7 28.9,25.2
  region net ACKX_PULSE_EXT<6>: 28.8,25.2 28.8,25.7 28.675,25.7 28.675,25.2
  region net N_COX_OFF_EXT<5>: 27.9,25.2 27.9,25.7 27.775,25.7 27.775,25.2
  region net N_COX_ON_EXT<6>: 28.35,25.2 28.35,25.7 28.225,25.7 28.225,25.2
  region net N_COX_OFF_EXT<6>: 28.575,25.2 28.575,25.7 28.45,25.7 28.45,25.2
  region net N_COX_ON_EXT<5>: 27.675,25.2 27.675,25.7 27.55,25.7 27.55,25.2
  region net N_COX_OFF_EXT<7>: 29.25,25.2 29.25,25.7 29.125,25.7 29.125,25.2
  region net S_EXT<3>: 27.676,19.4 27.676,19.9 27.55,19.9 27.55,19.4
  region net S_EXT<5>: 28.575,19.4 28.575,19.899 28.45,19.899 28.45,19.4
  region net N_P_EXT<5>: 28.35,19.4 28.35,19.899 28.225,19.899 28.225,19.4
  region net S_EXT<4>: 28.126,19.4 28.126,19.9 28.001,19.9 28.001,19.4
  region net N_P_EXT<4>: 27.9,19.4 27.9,19.899 27.775,19.899 27.775,19.4
  region net N_P_EXT<6>: 28.8,19.4 28.8,19.899 28.675,19.899 28.675,19.4
  region net S_EXT<6>: 29.026,19.4 29.026,19.9 28.901,19.9 28.901,19.4
  region net N_P_EXT<7>: 29.25,19.4 29.25,19.899 29.125,19.899 29.125,19.4
  region net N_COX_ON_EXT<2>: 25.65,25.2 25.65,25.7 25.525,25.7 25.525,25.2
  region net ACKX_PULSE_EXT<3>: 26.775,25.2 26.775,25.7 26.65,25.7 26.65,25.2
  region net N_COX_OFF_EXT<3>: 26.55,25.2 26.55,25.7 26.425,25.7 26.425,25.2
  region net N_COX_ON_EXT<3>: 26.325,25.2 26.325,25.7 26.2,25.7 26.2,25.2
  region net ACKX_PULSE_EXT<2>: 26.1,25.2 26.1,25.7 25.975,25.7 25.975,25.2
  region net N_COX_OFF_EXT<4>: 27.225,25.2 27.225,25.7 27.1,25.7 27.1,25.2
  region net N_COX_ON_EXT<4>: 27,25.2 27,25.7 26.875,25.7 26.875,25.2
  region net N_COX_OFF_EXT<2>: 25.875,25.2 25.875,25.7 25.75,25.7 25.75,25.2
  region net VMODE_EXT: 25.65,19.4 25.65,19.899 25.525,19.899 25.525,19.4
  region net N_P_EXT<2>: 27,19.4 27,19.9 26.875,19.9 26.875,19.4
  region net S_EXT<2>: 27.225,19.4 27.225,19.899 27.1,19.899 27.1,19.4
  region net N_P_EXT<0>: 26.101,19.4 26.101,19.9 25.975,19.9 25.975,19.4
  region net S_EXT<0>: 26.326,19.4 26.326,19.899 26.201,19.899 26.201,19.4
  region net N_P_EXT<1>: 26.551,19.4 26.551,19.9 26.426,19.9 26.426,19.4
  region net S_EXT<1>: 26.776,19.4 26.776,19.9 26.651,19.9 26.651,19.4
  region net AER_DIS_EXT: 25.875,19.4 25.875,19.899 25.75,19.899 25.75,19.4
  region net N_COX_ON_EXT<0>: 24.3,25.2 24.3,25.7 24.175,25.7 24.175,25.2
  region net N_COX_OFF_EXT<1>: 25.2,25.2 25.2,25.7 25.075,25.7 25.075,25.2
  region net N_COX_ON_EXT<1>: 24.975,25.2 24.975,25.7 24.85,25.7 24.85,25.2
  region net ACKX_PULSE_EXT<0>: 24.75,25.2 24.75,25.7 24.625,25.7 24.625,25.2
  region net N_COX_OFF_EXT<0>: 24.525,25.2 24.525,25.7 24.4,25.7 24.4,25.2
  rectangle net VPOS_CM: 23.4,22.824 23.9,22.949
  rectangle net ISPKFAST: 23.4,23.049 23.9,23.174
  rectangle net VIL: 23.4,24.399 23.9,24.524
  rectangle net AVDD: 23.4,24.624 23.9,24.749
  rectangle net IBLEED: 23.4,23.724 23.9,23.849
  rectangle net ITH: 23.4,23.499 23.9,23.624
  rectangle net ITAIL: 23.4,23.274 23.9,23.399
  rectangle net ISPK: 23.4,23.949 23.9,24.074
  rectangle net ISLEW: 23.4,24.174 23.9,24.299
  rectangle net VDDPST: 23.4,21.024 23.9,21.149
  rectangle net DVDD: 23.4,20.799 23.9,20.924
  rectangle net VDD: 23.4,21.249 23.9,21.374
  rectangle net GND: 23.4,22.149 23.9,22.274
  rectangle net VREFL: 23.4,22.374 23.9,22.499
  rectangle net AVDD: 23.4,21.699 23.9,21.824
  rectangle net HEM_OUT: 23.4,21.924 23.9,22.049
  rectangle net LCVDD: 23.4,21.474 23.9,21.599
  region net POS_CALIB: 24.975,19.4 24.975,19.899 24.85,19.899 24.85,19.4
  region net VTOP: 24.525,19.4 24.525,19.9 24.4,19.9 24.4,19.4
  region net SOUT: 24.3,19.4 24.3,19.899 24.175,19.899 24.175,19.4
  region net POLING_MODE_SW: 24.75,19.4 24.75,19.899 24.625,19.899 24.625,19.4
  region net POS_TEST: 25.2,19.4 25.2,19.899 25.075,19.899 25.075,19.4
  rectangle net SCLK: 23.4,20.349 23.9,20.474

## Silkscreen, mask and mechanical layers (free items; w line width, h text height)
Top Overlay:
  drawing of 18 lines, arcs and shapes, not listed
  text "Fondazione  / Bruno Kessler" at 31.839,33.824 h0.5
  text "KU Leuven / MICAS" at 19.913,33.82 h0.5
  text "*" at 22.887,24.856 h2
  text "Z-axis mill:   / 0.725 mm" at 25.399,21.576 h0.5
  text "e-Skin v1" at 22.381,15.025 h1.52
  text "mark.alea@kuleuven.be" at 20.108,13.75 h1
  text "TSMC Chip: March '22 / FBK Chips: Oct '22 / PCB: October '22 / For packaging of TSMC and FBK chips" at 20.2,10.483 h0.5
  text "Z-axis milling of 0.725mm depth /  / At the center, indicated with layer called \"Z Milling\" and with Top Overlay Line Width of 0.001mm /  / Rectangle area to be milled has four drill circles at the corners" at 70.155,-25.4 h10
Top Solder:
  rectangle: 23.4,21.474 23.9,21.599
  rectangle: 23.4,24.174 23.9,24.299
  rectangle: 23.4,23.949 23.9,24.074
  rectangle: 23.4,23.274 23.9,23.399
  rectangle: 23.4,23.499 23.9,23.624
  rectangle: 23.4,23.724 23.9,23.849
  rectangle: 23.4,24.624 23.9,24.749
  rectangle: 23.4,24.399 23.9,24.524
  rectangle: 23.4,21.924 23.9,22.049
  rectangle: 23.4,21.699 23.9,21.824
  rectangle: 23.4,22.374 23.9,22.499
  rectangle: 23.4,23.049 23.9,23.174
  rectangle: 23.4,22.824 23.9,22.949
  rectangle: 23.4,22.599 23.9,22.724
  rectangle: 23.4,22.149 23.9,22.274
  rectangle: 23.4,21.249 23.9,21.374
  rectangle: 23.4,20.349 23.9,20.474
  rectangle: 23.4,20.574 23.9,20.699
  rectangle: 23.4,20.799 23.9,20.924
  rectangle: 23.4,21.024 23.9,21.149
  rectangle: 31.1,21.474 31.6,21.599
  rectangle: 31.1,23.724 31.6,23.849
  rectangle: 31.1,23.499 31.6,23.624
  rectangle: 31.1,23.274 31.6,23.399
  rectangle: 31.1,23.949 31.6,24.074
  rectangle: 31.1,24.174 31.6,24.299
  rectangle: 31.1,24.399 31.6,24.524
  rectangle: 31.1,24.624 31.6,24.749
  rectangle: 31.1,23.049 31.6,23.174
  rectangle: 31.1,22.149 31.6,22.274
  rectangle: 31.1,22.374 31.6,22.499
  rectangle: 31.1,22.598 31.6,22.724
  rectangle: 31.1,22.824 31.6,22.949
  rectangle: 31.1,21.699 31.6,21.824
  rectangle: 31.1,21.924 31.6,22.049
  rectangle: 31.1,21.024 31.6,21.149
  rectangle: 31.1,20.574 31.6,20.699
  rectangle: 31.1,20.349 31.6,20.474
  rectangle: 31.1,21.249 31.6,21.374
  rectangle: 31.1,20.799 31.6,20.924
  region: 30.825,19.4 30.825,19.9 30.7,19.9 30.7,19.4
  region: 25.875,19.4 25.875,19.9 25.75,19.9 25.75,19.4
  region: 27.451,19.4 27.451,19.9 27.325,19.9 27.325,19.4
  region: 29.925,19.4 29.925,19.9 29.8,19.9 29.8,19.4
  region: 29.7,19.4 29.7,19.9 29.575,19.9 29.575,19.4
  region: 30.15,19.4 30.15,19.9 30.025,19.9 30.025,19.4
  region: 30.376,19.4 30.376,19.9 30.251,19.9 30.251,19.4
  region: 30.6,19.4 30.6,19.9 30.475,19.9 30.475,19.4
  region: 29.475,19.4 29.475,19.9 29.35,19.9 29.35,19.4
  region: 29.25,19.4 29.25,19.9 29.125,19.9 29.125,19.4
  region: 29.026,19.4 29.026,19.9 28.901,19.9 28.901,19.4
  region: 28.8,19.4 28.8,19.9 28.675,19.9 28.675,19.4
  region: 27.9,19.4 27.9,19.9 27.775,19.9 27.775,19.4
  region: 28.126,19.4 28.126,19.9 28.001,19.9 28.001,19.4
  region: 28.35,19.4 28.35,19.9 28.225,19.9 28.225,19.4
  region: 28.575,19.4 28.575,19.9 28.45,19.9 28.45,19.4
  region: 27.676,19.4 27.676,19.9 27.55,19.9 27.55,19.4
  region: 26.776,19.4 26.776,19.9 26.651,19.9 26.651,19.4
  region: 26.551,19.4 26.551,19.9 26.426,19.9 26.426,19.4
  region: 26.326,19.4 26.326,19.9 26.201,19.9 26.201,19.4
  region: 26.101,19.4 26.101,19.9 25.975,19.9 25.975,19.4
  region: 27.225,19.4 27.225,19.9 27.1,19.9 27.1,19.4
  region: 27,19.4 27,19.9 26.875,19.9 26.875,19.4
  region: 25.2,19.4 25.2,19.9 25.075,19.9 25.075,19.4
  region: 25.426,19.4 25.426,19.9 25.301,19.9 25.301,19.4
  region: 25.65,19.4 25.65,19.9 25.525,19.9 25.525,19.4
  region: 24.75,19.4 24.75,19.9 24.625,19.9 24.625,19.4
  region: 24.3,19.4 24.3,19.9 24.175,19.9 24.175,19.4
  region: 24.525,19.4 24.525,19.9 24.4,19.9 24.4,19.4
  region: 24.975,19.4 24.975,19.9 24.85,19.9 24.85,19.4
  region: 27.45,25.2 27.45,25.7 27.325,25.7 27.325,25.2
  region: 25.875,25.2 25.875,25.7 25.75,25.7 25.75,25.2
  region: 30.825,25.2 30.825,25.7 30.7,25.7 30.7,25.2
  region: 29.25,25.2 29.25,25.7 29.125,25.7 29.125,25.2
  region: 29.475,25.2 29.475,25.7 29.35,25.7 29.35,25.2
  region: 30.6,25.2 30.6,25.7 30.475,25.7 30.475,25.2
  region: 30.375,25.2 30.375,25.7 30.25,25.7 30.25,25.2
  region: 30.15,25.2 30.15,25.7 30.025,25.7 30.025,25.2
  region: 29.7,25.2 29.7,25.7 29.575,25.7 29.575,25.2
  region: 29.925,25.2 29.925,25.7 29.8,25.7 29.8,25.2
  region: 27.675,25.2 27.675,25.7 27.55,25.7 27.55,25.2
  region: 28.575,25.2 28.575,25.7 28.45,25.7 28.45,25.2
  region: 28.35,25.2 28.35,25.7 28.225,25.7 28.225,25.2
  region: 27.9,25.2 27.9,25.7 27.775,25.7 27.775,25.2
  region: 28.8,25.2 28.8,25.7 28.675,25.7 28.675,25.2
  region: 29.025,25.2 29.025,25.7 28.9,25.7 28.9,25.2
  region: 28.125,25.2 28.125,25.7 28,25.7 28,25.2
  region: 27,25.2 27,25.7 26.875,25.7 26.875,25.2
  region: 27.225,25.2 27.225,25.7 27.1,25.7 27.1,25.2
  region: 26.1,25.2 26.1,25.7 25.975,25.7 25.975,25.2
  region: 26.325,25.2 26.325,25.7 26.2,25.7 26.2,25.2
  region: 26.55,25.2 26.55,25.7 26.425,25.7 26.425,25.2
  region: 26.775,25.2 26.775,25.7 26.65,25.7 26.65,25.2
  region: 24.525,25.2 24.525,25.7 24.4,25.7 24.4,25.2
  region: 24.75,25.2 24.75,25.7 24.625,25.7 24.625,25.2
  region: 24.975,25.2 24.975,25.7 24.85,25.7 24.85,25.2
  region: 25.65,25.2 25.65,25.7 25.525,25.7 25.525,25.2
  region: 25.425,25.2 25.425,25.7 25.3,25.7 25.3,25.2
  region: 25.2,25.2 25.2,25.7 25.075,25.7 25.075,25.2
  region: 24.3,25.2 24.3,25.7 24.175,25.7 24.175,25.2
Z Milling (Mech3):
  circle w0: c24.5,20.5 r0.4
  circle w0: c30.5,20.5 r0.4
  circle w0: c30.5,24.5 r0.4
  circle w0: c24.5,24.5 r0.4
  rectangle: 24.5,20.5 30.5,24.6
Mechanical 14:
  region: 36.72,16.388
  region: 34.64,16.536
  region: 20.349,28.575
  region: 18.269,28.723